# Altium PCB encoder.PcbDoc
Units mil, origin at the board's own origin, x right, y up, seen from the top; angles counter-clockwise.
Board outline 1181.1 x 1181.1 mil, 2 copper layers (Top Layer, Bottom Layer); 9 components, 6 nets, 24 pads, 3 vias.
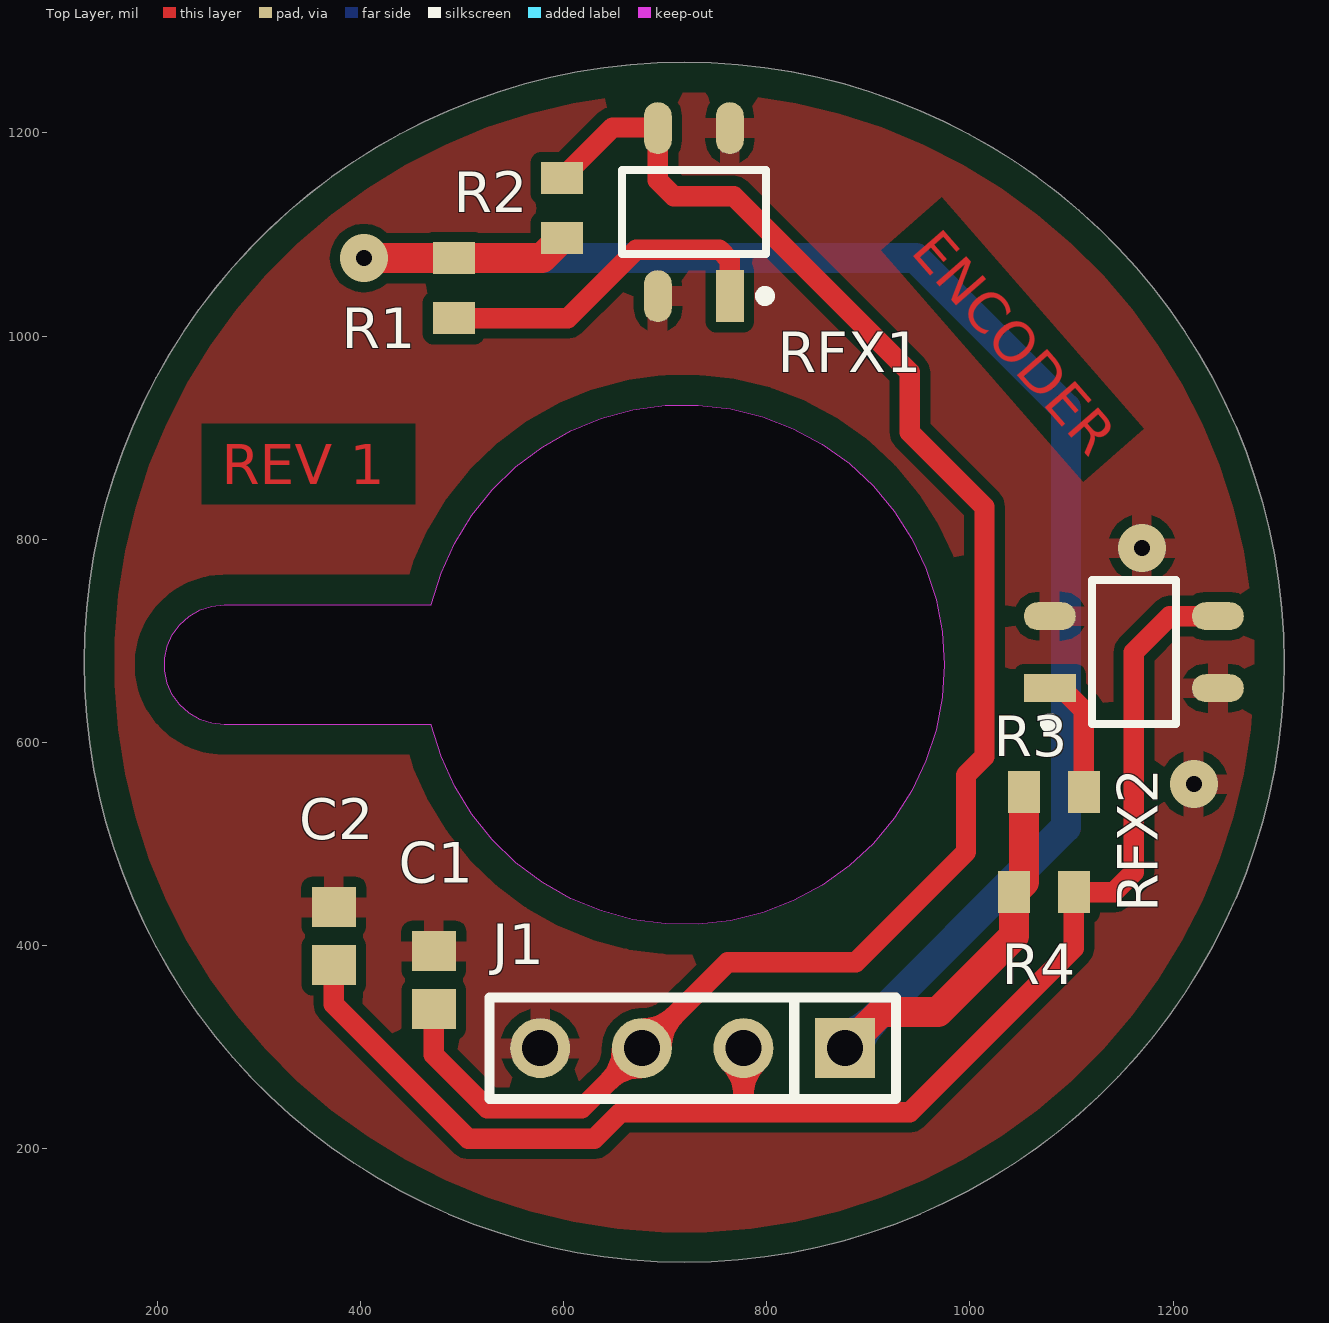
[diagram p0: Top Layer view]
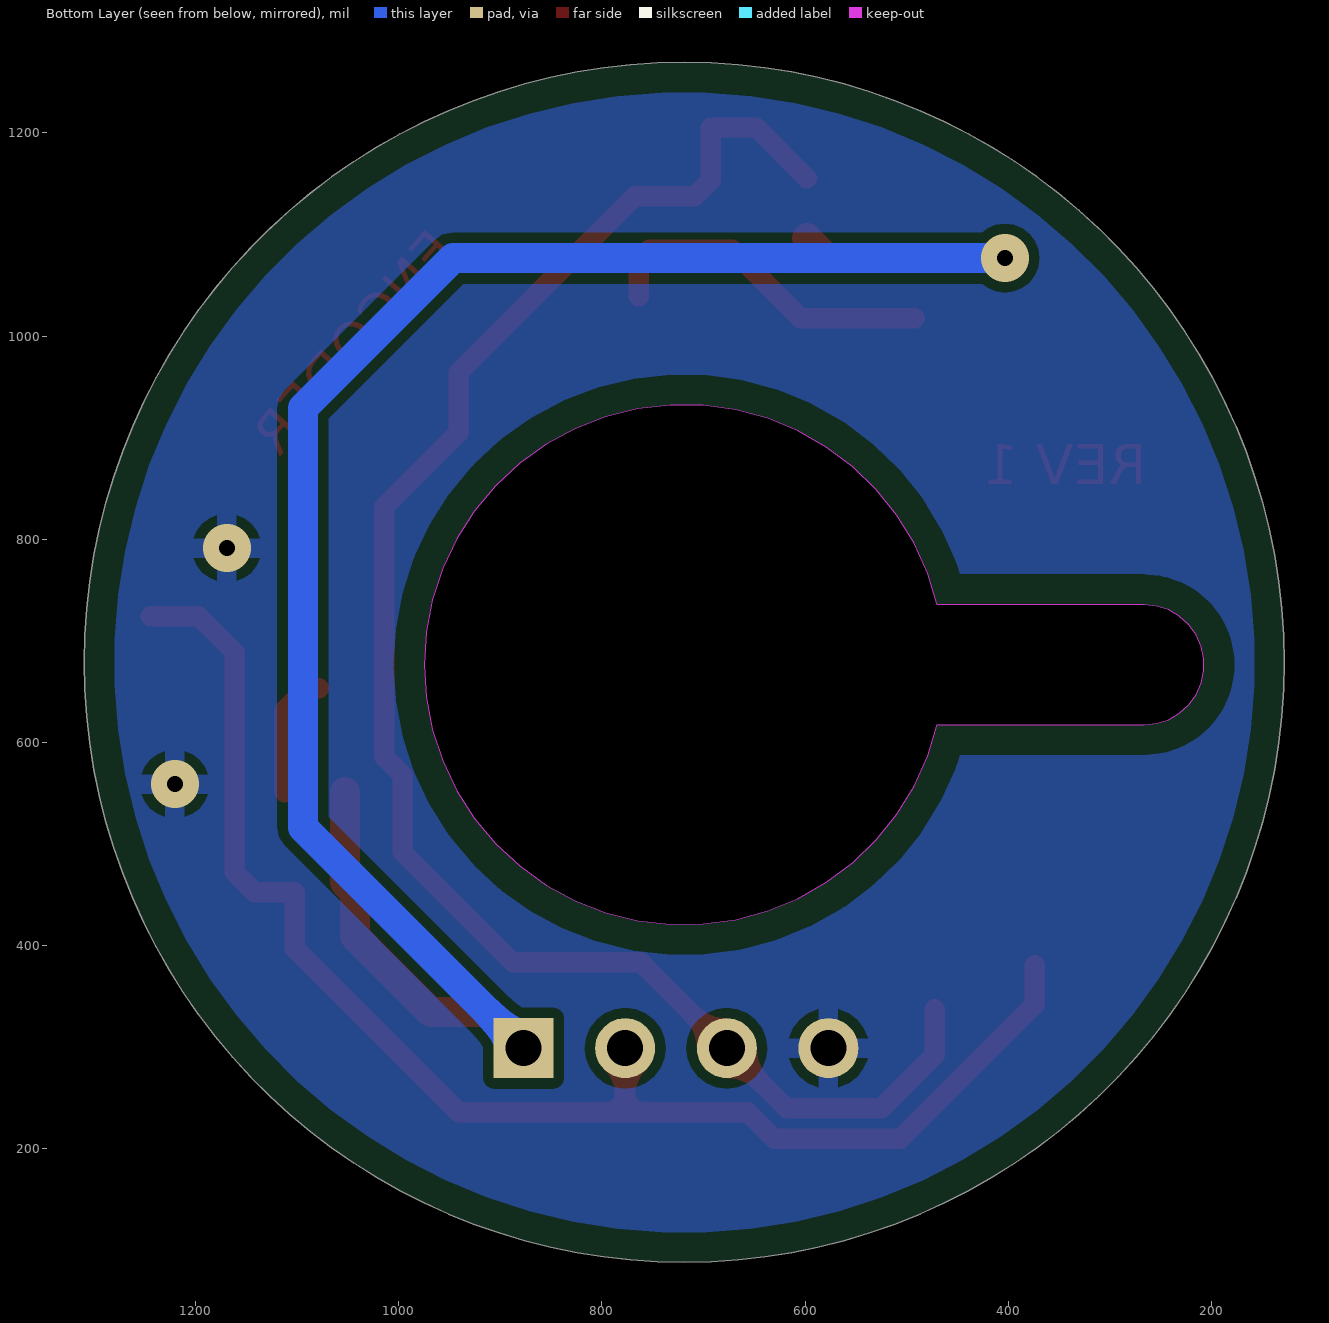
[diagram p1: Bottom Layer view, seen from below]

## Layer stack, top to bottom
Top Solder: solder mask 0.4, Solder Resist, Dk 3.5
Top Layer: signal copper 1.4
Dielectric1: dielectric 12.6, FR-4, Dk 4.8
Bottom Layer: signal copper 1.4
Bottom Solder: solder mask 0.4, Solder Resist, Dk 3.5

## Board outline
718.98,88.42 cw(c718.98,678.98) 128.42,678.98 cw(c718.98,678.98) 718.98,1269.53 cw(c718.98,678.98) 1309.53,678.98 cw(c718.98,678.98)
cut-out: 266.34,617.59 254.06,618.88 242.32,622.69 231.63,628.86 222.45,637.13 215.2,647.11 210.18,658.39 207.61,670.47 207.61,682.81 210.18,694.89 215.2,706.17 222.45,716.16 231.63,724.42 242.32,730.59 254.06,734.41 266.34,735.7 470.1,735.7 479.54,766.63 492.8,796.13 509.68,823.72 529.9,848.96 553.15,871.44 579.04,890.82 607.17,906.77 637.09,919.05 668.32,927.46 700.36,931.86 732.71,932.18 764.83,928.43 796.22,920.65 826.38,908.97 854.83,893.58 881.11,874.73 904.8,852.72 925.52,827.89 942.95,800.64 956.8,771.42 966.86,740.68 972.96,708.92 975,676.64 972.96,644.36 966.86,612.6 956.8,581.86 942.95,552.64 925.52,525.39 904.8,500.57 881.11,478.55 854.83,459.7 826.38,444.31 796.22,432.63 764.83,424.85 732.71,421.1 700.37,421.42 668.32,425.82 637.09,434.23 607.17,446.51 579.04,462.46 553.15,481.84 529.9,504.33 509.68,529.57 492.8,557.15 479.54,586.65 470.1,617.59

## Design rules (kind name [scope] priority, off if disabled: settings)
BoardOutlineClearance [All] p1: gap=29.53 ignorepadtopadclearanceinfootprint=FALSE
Clearance [All] p1: gap=10 ignorepadtopadclearanceinfootprint=TRUE
FabricationTestPointUsage TestPointUsage [All] p1: valid=0 allowmultiple=FALSE
FabricationTestpoint Testpoint [All] p1: side=3 testpointundercomponent=TRUE minsize=40 maxsize=100 preferedsize=60 minholesize=0 maxholesize=40 preferedholesize=32 testpointgrid=1 allowsidetop=TRUE allowsidebottom=TRUE usegrid=TRUE gridtolerance=0.01
HoleSize [All] p1: absolutevalues=TRUE maxlimit=196.85 minlimit=15.75 maxpercent=80.000 minpercent=20.000
PlaneConnect [All] p1: planeconnectstyle=Relief reliefexpansion=20 reliefentries=4 reliefconductorwidth=19.68 reliefairgap=10
PolygonConnect [All] p1: connectstyle=Relief reliefconductorwidth=19.68 reliefentries=4 polygonreliefangle="90 Angle" airgapwidth=10
RoutingVias [All] p1: holewidth=15.75 width=47.24 viastyle="Through Hole" minholewidth=15.75 minwidth=35.43 maxholewidth=196.85 maxwidth=787.4
SilkToSolderMaskClearance SilkscreenOverComponentPads [IsPad] p1: minsilkscreentomaskgap=10 clearancetoexposedcopper=TRUE
SolderMaskExpansion [All] p1: expansion=4
Width Width_power [InNet('GND') or InNet('VCC')] p1: maxlimit=787.4 minlimit=9.84 preferedwidth=29.53
Width [All] p2: maxlimit=5000 minlimit=10 preferedwidth=20
25 further rules are at their usual default settings.

## Components (designator, comment, footprint, x,y, rotation, side; value= is the part's Value field where it differs from the comment)
C1 "CAP" CAPC1608X08M 472.44,366.14 r270 top value=10n
C2 "CAP" CAPC1608X08M 374.02,409.45 r270 top value=10n
J1 "HDR1X4" HEADER_1X4 727.17,299.21 r180 top
R1 "RES" RESC1608X06M 492.13,1047.24 r90 top value=1K
R2 "RES" RESC1608X06M 598.43,1125.98 r270 top value=47K
R3 "RES" RESC1608X06M 1082.68,551.18 r180 top value=1K
R4 "RES" RESC1608X06M 1072.83,452.76 r180 top value=47K
RFX1 "QRE113GR" RFX4 728.35,1122.05 r90 top
RFX2 "QRE113GR" RFX4 1161.42,688.98 r0 top

## Footprints (in the part's own frame and the unit in brackets; to place one, negate y for a bottom-side part, rotate by r counter-clockwise, add the part's x,y. Pads: shape width x height; smd on the part's side, far side on the other; paste and mask are expansions set on the pad)
CAPC1608X08M [mm] "Chip Capacitor, 2-Leads, Body 1,60x0,80mm, IPC Low Density"
  rect 1x1.1 smd: 1(-0.725,0) 2(0.725,0)
  body extent -0.87,-0.48 0.87,0.47, height 0.85
HEADER_1X4 [mm]
  rect 1.5x1.5 hole 0.9: 1(-3.81,0)
  round 1.5 hole 0.9: 2(-1.27,0) 3(1.27,0) 4(3.81,0)
  silkscreen extent -5.08,-1.27 5.08,1.27
RESC1608X06M [mm] "Chip Resistor, 2-Leads, Body 1,60x0,82mm, IPC Low Density"
  rect 0.8x1.05 smd: 1(-0.75,0) 2(0.75,0)
  body extent -0.85,-0.48 0.85,0.48, height 0.6
RFX4 [mm] "SOP, 4-Leads, Body 3,40x2,70mm, Pitch 1,80mm, IPC Medium Density"
  rect 1.3x0.7 smd: 1(-2.1,-0.9)
  oval 1.3x0.7 smd: 2(2.1,-0.9) 3(2.1,0.9) 4(-2.1,0.9)
  silkscreen extent -2.22,-1.9 1.05,1.8, body extent -1.45,-1.8 1.45,1.8, height 1.7

## Part data
C1 C2: "Capacitor", LatestRevisionDate=17-Jul-2002, LatestRevisionNote="Re-released for DXP Platform.", PackageDescription="Polarized Capacitor (Radial); 2 Leads", PackageReference=RB7.6-15, Published=8-Jun-2000, Publisher="Altium Limited"
J1: "4pin header"
R1 R2 R3 R4: "Resistor", LatestRevisionDate=17-Jul-2002, LatestRevisionNote="Re-released for DXP Platform.", PackageDescription="Axial Device, Thru-Hole; 2 Leads; 0.4 in Pin Spacing", PackageReference=AXIAL-0.4, Published=8-Jun-2000, Publisher="Altium Limited"
RFX1 RFX2: "SMT Reflective Object Sensor"

## Via types
v1: diameter 47.24, hole 15.75, Top Layer to Bottom Layer, 3 vias

## Nets (pads, with @x,y where several pads share a name; then routed paths per layer and width w, separated by ;. In a path a pad name is that pad's centre, name@x,y a point inside that pad or via, vN(x,y) a via of type N, cw(c..) or ccw(c..) an arc to the next point about the centre after c; other vN are vias at no path point)
GND: C1.1 C2.1 J1.4 RFX1.2 RFX1.4 RFX2.2 RFX2.4
  other v1: 1220.47,559.06 1169.29,791.34
NetC1_2: C1.2 J1.3 R2.1 RFX1.3 | length 1698.5
  Top Layer w20: C1.2 472.44,292.62 524.9,240.16 618.11,240.16 J1.3 761.86,383.91 887.84,383.91 996.21,492.27 996.21,567.83 1014.41,586.02 1014.41,832.05 940.94,905.51 940.94,964.57 767.72,1137.8 708.66,1137.8 692.91,1153.54 RFX1.3 692.91,1205.43 648.34,1205.43 R2.1
NetC2_2: C2.2 J1.2 R4.1 RFX2.3 | length 1398.4
  Top Layer w20: C2.2 374.02,342.52 506.38,210.16 630.54,210.16 656.6,236.22 777.17,236.22 ; J1.2 777.17,236.22 ; RFX2.3 1196.85,724.41 1161.42,688.98 1161.42,472.44 1141.73,452.76 R4.1 1102.36,397.64 940.94,236.22 777.17,236.22
NetR1_1: R1.1 RFX1.1 | length 339.1
  Top Layer w20: R1.1 604.33,1017.72 671.57,1084.96 753.62,1084.96 763.78,1074.8 RFX1.1
NetR3_1: R3.1 RFX2.1 | length 123.1
  Top Layer w20: RFX2.1 1090.55,653.54 1112.2,631.89 R3.1
VCC: J1.1 R1.2 R2.2 R3.2 R4.2 | length 2032.7
  Top Layer w29.53: v1(403.54,1076.77) R1.2 578.74,1076.77 R2.2 ; J1.1 912.6,334.65 968.5,334.65 1043.31,409.45 R4.2 1053.15,462.6 R3.2
  Bottom Layer w29.53: v1(403.54,1076.77) 946.85,1076.77 1094.49,929.13 1094.49,516.54 J1.1

## Polygon pours and split planes (outlines as drawn)
GND on Top Layer "GroundPour" (solid, remove dead copper, pour order 0): 718.98,88.42 cw(c718.98,678.98) 128.42,678.98 cw(c718.98,678.98) 718.98,1269.53 cw(c718.98,678.98) 1309.53,678.98 cw(c718.98,678.98)
GND on Bottom Layer "Top Layer-GND" (solid, remove dead copper, pour order 1): 718.98,88.42 cw(c718.98,678.98) 128.42,678.98 cw(c718.98,678.98) 718.98,1269.53 cw(c718.98,678.98) 1309.53,678.98 cw(c718.98,678.98)

## Other copper
Top Layer:
  text "ENCODER" at 940.94,1082.68 h39.37 r311.08
  text "REV 1" at 263.78,854.33 h39.37

## Silkscreen, mask and mechanical layers (free items; w line width, h text height)
Mechanical 16:
  drawing of 1874 lines, arcs and shapes, not listed
  text "1" at -3154.02,3873.98 h70
  text "2" at -294.02,3873.98 h70
  text "3" at 2585.98,3873.98 h70
  text "4" at 5455.98,3873.98 h70
  text "A" at -4506.02,2967.98 h70
  text "A" at 6793.98,2967.98 h70
  text "B" at -4506.02,1075.98 h70
  text "B" at 6793.98,1075.98 h70
  text "C" at -4506.02,-834.02 h70
  text "C" at 6793.98,-834.02 h70
  text "ENGINEER:" at 2268.98,-2291.02 h45
  text "TITLE:" at 3768.98,-2291.02 h45
  text "PCB DESIGNER:" at 2268.98,-2586.02 h45
  text "D" at -4506.02,-2724.02 h70
  text "D" at 6793.98,-2724.02 h70
  text "DATE:" at 2268.98,-2891.02 h45
  text "PART NO.:" at 3768.98,-2891.02 h45
  text "REV:" at 5868.98,-2891.02 h45
  text "Altium Limited" at 968.98,-2991.02 h70
  text ".PRINT_DATE" at 2318.98,-3011.02 h70
  text "12a Rodborough Rd" at 968.98,-3091.02 h70
  text "Frenchs Forest" at 968.98,-3191.02 h70
  text "FILE NAME:" at 2268.98,-3191.02 h45
  text "DWG NO:" at 3768.98,-3191.02 h45
  text "SCALE:" at 5868.98,-3191.02 h45
  text "NSW 2086" at 968.98,-3291.02 h70
  text ".PCB_FILE_NAME_NO_PATH" at 2318.98,-3311.02 h70
  text "1" at -3154.02,-3526.02 h70
  text "2" at -294.02,-3526.02 h70
  text "3" at 2585.98,-3526.02 h70
  text "4" at 5455.98,-3526.02 h70